# Altium PCB PCB.PcbDoc
Units mm, origin at the board's own origin, x right, y up, seen from the top; angles counter-clockwise.
Board outline 36.25 x 30 mm, 2 copper layers (Top Layer, Bottom Layer); 139 components, 96 nets, 393 pads, 78 vias.
Unrouted connection lines stored in the file: 283.
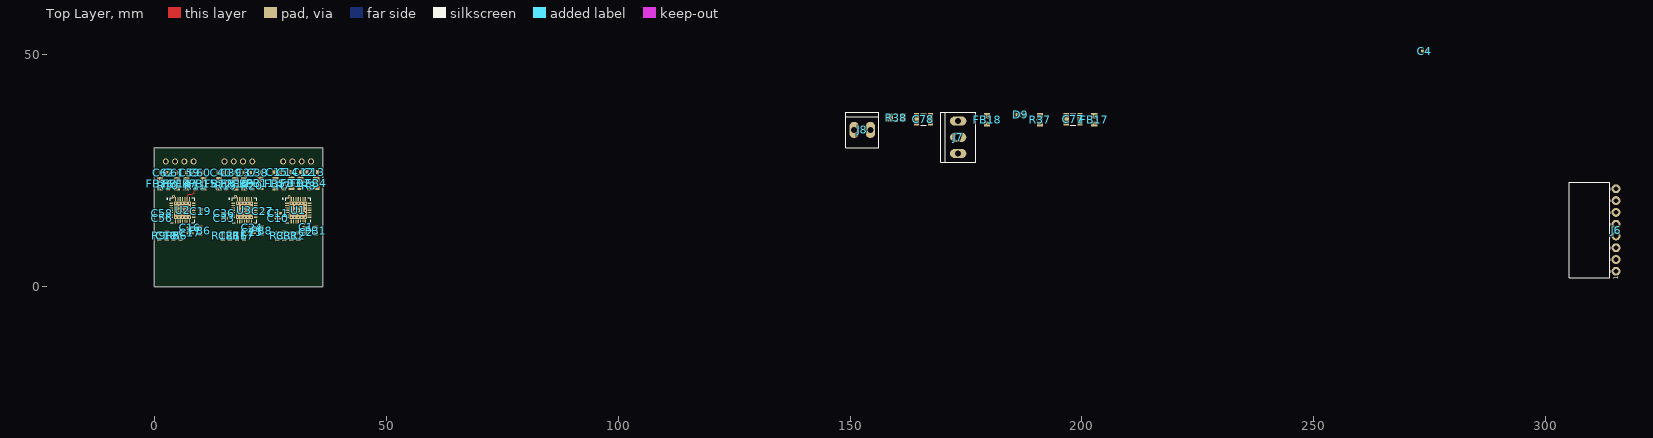
[diagram p0: Top Layer view]
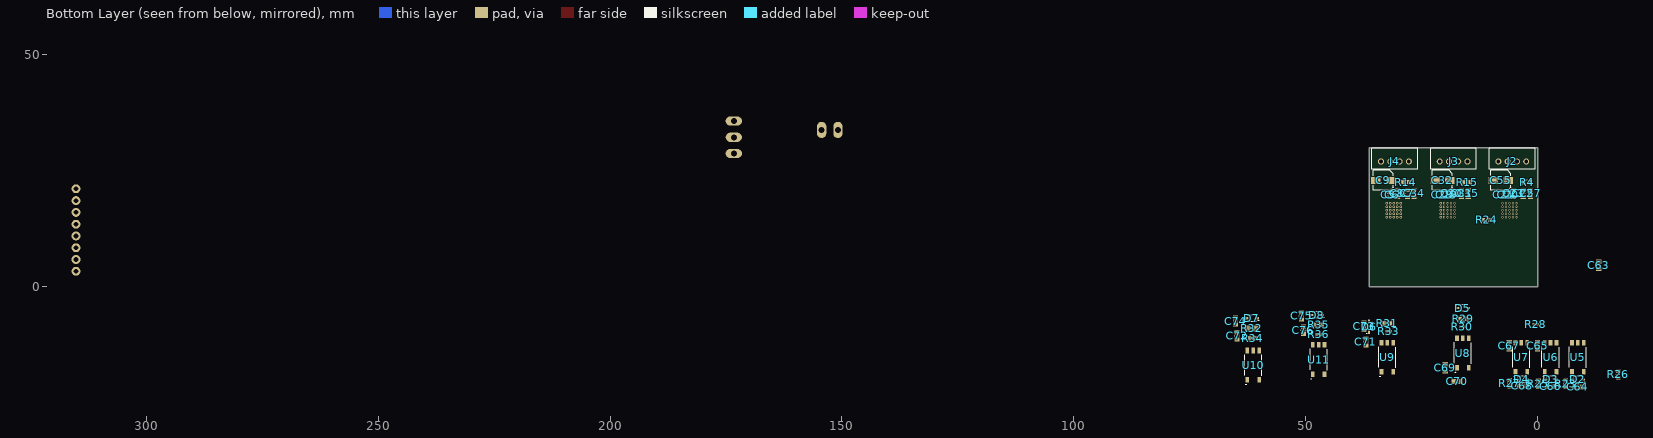
[diagram p1: Bottom Layer view, seen from below]

## Layer stack, top to bottom
Top Solder: solder mask 0.0102, Solder Resist, Dk 3.5
Top Layer: signal copper 0.0356
Dielectric 1: dielectric 0.32, FR-4, Dk 4.8
Bottom Layer: signal copper 0.0356
Bottom Solder: solder mask 0.0102, Solder Resist, Dk 3.5

## Board outline
0,0 0,30 36.25,30 36.25,0

## Design rules (kind name [scope] priority, off if disabled: settings)
Clearance [All] p1: gap=0.15 ignorepadtopadclearanceinfootprint=FALSE
PolygonConnect [All] p1: connectstyle=Relief reliefconductorwidth=0.254 reliefentries=4 polygonreliefangle="90 Angle" airgapwidth=0.254
RoutingVias [All] p1: holewidth=0.2 width=1.27 viastyle="Through Hole" minholewidth=0.2 minwidth=1.27 maxholewidth=0.2 maxwidth=2
SolderMaskExpansion [All] p1: expansion=0.102 istentingtop=FALSE
SupplyNets "Schematic Supply Nets_6" [InNet('SGND')] p1: voltage=0.000
SupplyNets "Schematic Supply Nets_5" [InNet('PGND')] p2: voltage=0.000
SupplyNets "Schematic Supply Nets_4" [InNet('GND')] p3: voltage=0.000
SupplyNets "Schematic Supply Nets_3" [InNet('+VREF_TMC')] p4: voltage=0.000
SupplyNets "Schematic Supply Nets_2" [InNet('+5V')] p5: voltage=0.000
SupplyNets "Schematic Supply Nets_1" [InNet('+5VOUT_TMC')] p6: voltage=0.000
SupplyNets "Schematic Supply Nets" [InNet('+24V')] p7: voltage=0.000
Width [All] p1: maxlimit=0.254 minlimit=0.254 preferedwidth=0.254
30 further rules are at their usual default settings.

## Classes and differential pairs
component class "STEPPER MOTOR DRIVERS": C1 C2 C3 C4 C5 C6 C7 C8 C9 C10 C11 C12 C13 C14 C15 C16 C17 C18 C19 C20 C21 C22 C23 C24 C25 C26 C27 C28 C29 C30 C31 C32 C33 C34 C35 C36 C37 C38 C39 C40 C55 C56 C57 C58 C59 C60 C61 C62 FB1 FB2 FB3 FB4 FB5 FB6 FB7 FB8 FB9 FB10 FB11 FB12 FB14 FB15 FB16 J2 J3 J4 R1 R2 R3 R4 R5 R6 R7 R8 R9 R10 R11 R14 R15 R16 R17 R18 R19 R20 U1 U2 U3
component class Root: C77 C78 D9 FB17 FB18 J7 J8 R37 R38
component class OPTOCUPLERS: C63 C64 C65 C66 C67 C68 C69 C70 C71 C72 C73 C74 C75 C76 D2 D3 D4 D5 D6 D7 D8 J6 R23 R24 R25 R26 R27 R28 R29 R30 R31 R32 R33 R34 R35 R36 U5 U6 U7 U8 U9 U10 U11

## Components (designator, comment, footprint, x,y, rotation, side; value= is the part's Value field where it differs from the comment)
C1 "100nF/16V" CAPC1005X04N 32.7,12.8 r0 top value=100nF
C2 "10nF/16V" CAPC1005X04N 32.7,11.8 r0 top value=10nF
C3 "1uF/16V" CAPC1608X06N 28,11 r90 top value=1uF
C4 "1uF/16V" CAPC1005X04N 273.915,50.831 r0 top value=1uF
C5 "10nF/50V" CAPC1005X04N 32.2,19.877 r90 bottom value=10nF
C6 "100nF/50V" CAPC1005X04N 31.3,19.877 r90 bottom value=100nF
C7 "10uF/50V" CAPC1608X06M 28.05,20.11 r90 bottom value=10uF
C8 "10uF/50V" CAPC1608X06M 30.2,20.11 r90 bottom value=10uF
C9 "100uF/50V" CAPAE4543X55L 33.275,22.925 r0 bottom value=100uF
C10 "100nF/50V" CAPC1005X04N 26.7,14.8 r180 top value=100nF
C11 "22nF/50V" CAPC1005X04N 26.7,15.835 r180 top value=22nF
C12 "470pF/100V" CAPC1608X06L 32.2,24.7 r180 top value=470pF
C13 "470pF/100V" CAPC1608X06L 34.5,24.7 r0 top value=470pF
C14 "470pF/100V" CAPC1608X06L 28.8,24.7 r0 top value=470pF
C15 "470pF/100V" CAPC1608X06L 26.5,24.7 r180 top value=470pF
C16 "100nF/16V" CAPC1005X04N 7.7,12.7 r0 top value=100nF
C17 "10nF/16V" CAPC1005X04N 7.7,11.6 r0 top value=10nF
C18 "1uF/16V" CAPC1608X06N 2.609,11 r90 top value=1uF
C19 "1uF/16V" CAPC1005X04N 10.025,16.231 r270 top value=1uF
C20 "10nF/50V" CAPC1005X04N 6.303,19.877 r90 bottom value=10nF
C21 "100nF/50V" CAPC1005X04N 7.253,19.877 r90 bottom value=100nF
C22 "10uF/50V" CAPC1608X06M 3.072,20.11 r90 bottom value=10uF
C23 "10uF/50V" CAPC1608X06M 5.161,20.11 r90 bottom value=10uF
C24 "100nF/16V" CAPC1005X04N 21.1,12.7 r0 top value=100nF
C25 "10nF/16V" CAPC1005X04N 21.1,11.7 r0 top value=10nF
C26 "1uF/16V" CAPC1608X06N 16.25,11 r90 top value=1uF
C27 "1uF/16V" CAPC1005X04N 23.4,16.3 r270 top value=1uF
C28 "10nF/50V" CAPC1005X04N 20.55,19.877 r90 bottom value=10nF
C29 "100nF/50V" CAPC1005X04N 19.625,19.877 r90 bottom value=100nF
C30 "10uF/50V" CAPC1608X06M 18.475,20.11 r90 bottom value=10uF
C31 "10uF/50V" CAPC1608X06M 16.362,20.11 r90 bottom value=10uF
C32 "100uF/50V" CAPAE4543X55L 20.5,22.925 r0 bottom value=100uF
C33 "100nF/50V" CAPC1005X04N 15.1,14.8 r180 top value=100nF
C34 "47uF/50V" CAPC1608X06M 26.6,20.11 r90 bottom value=47uF
C35 "47uF/50V" CAPC1608X06M 14.937,20.11 r90 bottom value=47uF
C36 "22nF/50V" CAPC1005X04N 15.1,15.835 r180 top value=22nF
C37 "470pF/100V" CAPC1608X06L 20,24.6 r180 top value=470pF
C38 "470pF/100V" CAPC1608X06L 22.3,24.6 r0 top value=470pF
C39 "470pF/100V" CAPC1608X06L 16.7,24.6 r0 top value=470pF
C40 "470pF/100V" CAPC1608X06L 14.4,24.6 r180 top value=470pF
C55 "100uF/50V" CAPAE4543X55L 7.909,22.925 r0 bottom value=100uF
C56 "100nF/50V" CAPC1005X04N 1.709,14.8 r180 top value=100nF
C57 "47uF/50V" CAPC1608X06M 1.482,20.11 r90 bottom value=47uF
C58 "22nF/50V" CAPC1005X04N 1.709,15.835 r180 top value=22nF
C59 "470pF/100V" CAPC1608X06L 7.565,24.6 r180 top value=470pF
C60 "470pF/100V" CAPC1608X06L 9.835,24.6 r0 top value=470pF
C61 "470pF/100V" CAPC1608X06L 4.235,24.6 r0 top value=470pF
C62 "470pF/100V" CAPC1608X06L 2.015,24.6 r180 top value=470pF
C63 "100nF/16V" CAPC1608X06M -13.2,4.6 r270 bottom value=100nF
C64 "10nF/16V" CAPC1608X06M -8.7,-21.6 r0 bottom value=10nF
C65 "100nF/16V" CAPC1608X06M 0,-12.7 r90 bottom value=100nF
C66 "10nF/16V" CAPC1608X06M -2.9,-21.5 r0 bottom value=10nF
C67 "100nF/16V" CAPC1608X06M 6.1,-12.7 r90 bottom value=100nF
C68 "10nF/16V" CAPC1608X06M 3.3,-21.4 r180 bottom value=10nF
C69 "100nF/16V" CAPC1608X06M 19.9,-17.5 r90 bottom value=100nF
C70 "10nF/16V" CAPC1608X06M 17.3,-20.4 r0 bottom value=10nF
C71 "100nF/16V" CAPC1608X06M 37,-11.9 r90 bottom value=100nF
C72 "100nF/16V" CAPC1608X06M 64.8,-10.6 r90 bottom value=100nF
C73 "10nF/16V" CAPC1608X06M 37.4,-8.5 r90 bottom value=10nF
C74 "10nF/16V" CAPC1608X06M 65.1,-7.4 r90 bottom value=10nF
C75 "100nF/16V" CAPC1608X06M 50.9,-6.3 r90 bottom value=100nF
C76 "10nF/16V" CAPC1608X06M 50.5,-9.4 r90 bottom value=10nF
C77 "22uF/30V" CAPC3225X27N 198.096,36.099 r0 top value=22uF
C78 "22uF/30V" CAPC3225X27N 165.838,36.099 r0 top value=22uF
D2 "*" SODFL250X90-2N -8.7,-20 r0 bottom
D3 "*" SODFL250X90-2N -2.9,-20 r180 bottom
D4 "*" SODFL250X90-2N 3.4,-20 r0 bottom
D5 "*" SODFL250X90-2N 16.1,-4.6 r180 bottom
D6 "*" SODFL250X90-2N 36.305,-8.6 r90 bottom
D7 "*" SODFL250X90-2N 61.6,-6.8 r0 bottom
D8 "*" SODFL250X90-2N 47.6,-6.1 r0 bottom
D9 "RED" DIOMELF1608L 186.793,37.115 r0 top
FB1 "200mA" INDC1608X06N 34.8,12.1 r90 top
FB2 "3A" INDC2012X07N 31.5,22.3 r90 top
FB3 "3A" INDC2012X07N 29.55,22.3 r90 top
FB4 "3A" INDC2012X07N 34.9,22.3 r90 top
FB5 "3A" INDC2012X07N 26.1,22.2 r90 top
FB6 "200mA" INDC1608X06N 9.9,12.1 r90 top
FB7 "3A" INDC2012X07N 6.909,22.2 r90 top
FB8 "200mA" INDC1608X06N 23.1,12.1 r90 top
FB9 "3A" INDC2012X07N 19.3,22.2 r90 top
FB10 "3A" INDC2012X07N 17.4,22.2 r90 top
FB11 "3A" INDC2012X07N 22.875,22.3 r90 top
FB12 "3A" INDC2012X07N 13.9,22.2 r90 top
FB14 "3A" INDC2012X07N 4.879,22.2 r90 top
FB15 "3A" INDC2012X07N 10.559,22.2 r90 top
FB16 "3A" INDC2012X07N 1.209,22.2 r90 top
FB17 "3A" INDC2012X07N 202.668,35.972 r90 top
FB18 "3A" INDC2012X07N 179.554,35.972 r90 top
J2 "4 PIN" B4B-PH-K-S 5.441,27.015 r0 bottom
J3 "4 PIN" B4B-PH-K-S 18.096,27.015 r0 bottom
J4 "4 PIN" B4B-PH-K-S 30.75,27.015 r0 bottom
J6 "CON8" GP8_2.54_FM_ANGLE 315.19,12.223 r90 top
J7 "3PIN" ARK3_3.5 173.331,28.733 r90 top
J8 "*" ARK2_3.5 152.63,33.813 r0 top
R1 "10k 1%" RESC1608X06N 29.5,10.948 r90 top value=10k
R2 "10k 1%" RESC1608X06N 31,10.948 r90 top value=10k
R3 "10k 1%" RESC1608X06N 26.5,10.948 r90 top value=10k
R4 "1R 1%" RESC1608X06N 2.254,22.537 r180 bottom value=1R
R5 "10k 1%" RESC1608X06N 4.109,10.948 r90 top value=10k
R6 "10k 1%" RESC1608X06N 5.609,10.948 r90 top value=10k
R7 "xx 1%" RESC1608X06N 27.9,21.791 r90 top value=xx
R8 "xx 1%" RESC1608X06N 33.4,21.791 r90 top value=xx
R9 "10k 1%" RESC1608X06N 1.059,10.948 r90 top value=10k
R10 "xx 1%" RESC1608X06N 2.985,21.791 r90 top value=xx
R11 "xx 1%" RESC1608X06N 8.885,21.791 r90 top value=xx
R14 "1R 1%" RESC1608X06N 28.4,22.525 r180 bottom value=1R
R15 "1R 1%" RESC1608X06N 15.2,22.525 r180 bottom value=1R
R16 "10k 1%" RESC1608X06N 17.8,10.948 r90 top value=10k
R17 "10k 1%" RESC1608X06N 19.3,10.948 r90 top value=10k
R18 "10k 1%" RESC1608X06N 14.7,10.948 r90 top value=10k
R19 "xx 1%" RESC1608X06N 15.5,21.791 r90 top value=xx
R20 "xx 1%" RESC1608X06N 21.1,21.791 r90 top value=xx
R23 "11.3k 1%" RESC1608X06M -6.1,-20.9 r90 bottom value=11.3k
R24 "33R 1%" RESC1608X06N 11,14.4 r0 bottom value=33R
R25 "11.3k 1%" RESC1608X06M -0.2,-20.9 r90 bottom value=11.3k
R26 "33R 1%" RESC1608X06N -17.4,-18.9 r270 bottom value=33R
R27 "11.3k 1%" RESC1608X06M 6,-20.8 r90 bottom value=11.3k
R28 "33R 1%" RESC1005X03N 0.4,-8.1 r0 bottom value=33R
R29 "11.3k 1%" RESC1608X06M 16,-6.9 r0 bottom value=11.3k
R30 "33R 1%" RESC1005X03N 16.2,-8.6 r0 bottom value=33R
R31 "11.3k 1%" RESC1608X06M 32.4,-7.9 r0 bottom value=11.3k
R32 "11.3k 1%" RESC2012X07N 61.6,-9 r0 bottom value=11.3k
R33 "33R 1%" RESC1005X03N 32.1,-9.6 r0 bottom value=33R
R34 "33R 1%" RESC1608X06N 61.4,-11.1 r0 bottom value=33R
R35 "11.3k 1%" RESC1608X06M 47.2,-8.2 r0 bottom value=11.3k
R36 "33R 1%" RESC1005X03N 47.2,-10.3 r0 bottom value=33R
R37 "1k 1%" RESC2012X07N 190.984,35.972 r90 top value=1k
R38 "1k 1%" RESC3216X14N 159.996,36.48 r0 top value=1k
U1 "TMC2209" QFN50P500X500X90_HS-29N 31,16.5 r0 top
U2 "TMC2209" QFN50P500X500X90_HS-29N 6.05,16.5 r0 top
U3 "TMC2209" QFN50P500X500X90_HS-29N 19.4,16.5 r0 top
U5 "TLP2312" SO-6-5 -8.7,-15.2 r180 bottom
U6 "TLP2312" SO-6-5 -2.8,-15.2 r180 bottom
U7 "TLP2312" SO-6-5 3.5,-15.2 r180 bottom
U8 "TLP2312" SO-6-5 16.1,-14.3 r180 bottom
U9 "TLP2312" SO-6-5 32.4,-15.2 r180 bottom
U10 "TLP2312" SO-6-5 61.3,-16.9 r180 bottom
U11 "TLP2312" SO-6-5 47.2,-15.7 r180 bottom

## Footprints (in the part's own frame and the unit in brackets; to place one, negate y for a bottom-side part, rotate by r counter-clockwise, add the part's x,y. Pads: shape width x height; smd on the part's side, far side on the other; paste and mask are expansions set on the pad)
ARK2_3.5 [mm] "Raster 3.5mm"
  rrect100% 2x3.5 hole 1.3 mask+0.1: 1(-1.75,0) 2(1.75,0)
  silkscreen extent -3.6,-3.8 3.6,3.8, body extent -3.75,-3.5 3.75,3.8, height 8.5
ARK3_3.5 [mm] "3.5mm"
  rrect100% 2x3.5 hole 1.3 mask+0.1: 1(0,0) 2(3.5,0) 3(7,0)
  silkscreen extent -1.85,-3.8 8.85,3.8, body extent -2,-3.55 9,3.75, height 8.5
B4B-PH-K-S [mm] "4WAY CONECTOR 2mm"
  round 1.3 hole 0.8: 1(3,0) 2(1,0) 3(-1,0) 4(-3,0)
  silkscreen extent -4.92,-2.83 4.97,1.68, body extent -4.92,-2.82 4.98,1.68, height 6
CAPAE4543X55L [mm] "Aluminum Electrolytic Capacitor, Body 4,30x4,30x5,50mm, IPC High Density"
  rect 2.05x1.45 smd: 1(-1.6,0) 2(1.6,0)
  silkscreen extent -2.15,-2.15 2.15,2.15, body extent -2.75,-2.15 2.75,2.15, height 4.7
CAPC1005X04N [mm] "Chip Capacitor, 2-Leads, Body 0402  1,00x0,50mm, IPC Medium Density"
  rect 0.62x0.62 smd: 1(-0.46,0) 2(0.46,0)
  body extent -0.5,-0.25 0.5,0.25, height 0.49
CAPC1608X06L [mm] "Chip Capacitor, 2-Leads, Body 0603  1,60x0,85mm, IPC High Density"
  rect 0.7x0.9 smd: 1(-0.65,0) 2(0.65,0)
  silkscreen extent -0.08,-0.45 0.08,0.45, body extent -0.8,-0.4 0.8,0.4, height 0.79
CAPC1608X06M [mm] "Chip Capacitor, 2-Leads, Body 0603  1,60x0,85mm, IPC Low Density"
  rect 0.92x1.1 smd: 1(-0.76,0) 2(0.76,0)
  silkscreen extent -0.08,-0.45 0.08,0.45, body extent -0.8,-0.4 0.8,0.4, height 0.79
CAPC1608X06N [mm] "Chip Capacitor, 2-Leads, Body 0603 1,60x0,85mm, IPC Medium Density"
  rect 0.82x1 smd: 1(-0.72,0) 2(0.72,0)
  silkscreen extent -0.08,-0.45 0.08,0.45, body extent -0.8,-0.4 0.8,0.4, height 0.79
CAPC3225X27N [mm] "Chip Capacitor 1210, 2-Leads, Body 3,20x2,50mm, IPC Medium Density"
  rect 1.1x2.65 smd: 1(-1.475,0) 2(1.475,0)
  silkscreen extent -0.55,-1.22 0.55,1.23, body extent -1.6,-1.25 1.6,1.25, height 2.7
DIOMELF1608L [mm] "MELF Diode, 2-Leads, Body 1,60x0,80mm, IPC High Density"
  rect 0.65x0.95 smd: 1(-0.75,0) 2(0.75,0)
  silkscreen extent -0.05,-0.38 0.05,0.38, body extent -0.8,-0.4 0.8,0.4, height 0.6
GP8_2.54_FM_ANGLE [mm]
  round 1.9 hole 1 mask+0.1: 1(-8.89,0) 2(-6.35,0) 3(-3.81,0) 4(-1.27,0)
  round 1.9 hole 1: 5(1.27,0) 6(3.81,0) 7(6.35,0) 8(8.89,0)
  silkscreen extent -10.26,1.2 10.26,10.1, body extent -10.16,-0.2 10.16,10, height 2.5
INDC1608X06N [mm] "Chip Inductor, 2-Leads, Body 1,60x0,85mm, IPC Medium Density"
  rect 0.775x0.95 smd: 1(-0.69,0) 2(0.69,0)
  silkscreen extent -0.08,-0.38 0.08,0.38, body extent -0.8,-0.4 0.8,0.4, height 0.6
INDC2012X07N [mm] "Chip Inductor, 2-Leads, Body 2,00x1,25mm, IPC Medium Density"
  rect 1.15x1.35 smd: 1(-0.875,0) 2(0.875,0)
  silkscreen extent -0.1,-0.6 0.1,0.6, body extent -1.15,-0.67 1.15,0.68, height 0.76
QFN50P500X500X90_HS-29N [mm] "QFN, 28-Leads, Body 5,00x5,00mm, Pitch 0,50mm, Thermal Pad 3,70x3,70mm, IPC Medium Density"
  rect 0.8x0.25 smd: 1(-2.425,1.5) 2(-2.425,1) 3(-2.425,0.5) 4(-2.425,0) 5(-2.425,-0.5) 6(-2.425,-1) 7(-2.425,-1.5) 15(2.425,-1.5) 16(2.425,-1) 17(2.425,-0.5) 18(2.425,0) 19(2.425,0.5) 20(2.425,1) 21(2.425,1.5)
  rect 0.25x0.8 smd: 8(-1.5,-2.425) 9(-1,-2.425) 10(-0.5,-2.425) 11(0,-2.425) 12(0.5,-2.425) 13(1,-2.425) 14(1.5,-2.425) 22(1.5,2.425) 23(1,2.425) 24(0.5,2.425) 25(0,2.425) 26(-0.5,2.425) 27(-1,2.425) 28(-1.5,2.425)
  rect 3.7x3.7 smd: 29(0,0)
  silkscreen extent -3.42,-2.65 2.65,2.65, body extent -2.5,-2.5 2.5,2.5, height 1
RESC1005X03N [mm] "Chip Resistor, 2-Leads, Body 1,00x0,50mm, IPC Medium Density"
  rect 0.65x0.55 smd: 1(-0.4,0) 2(0.4,0)
  body extent -0.5,-0.25 0.5,0.25, height 0.27
RESC1608X06M [mm] "Chip Resistor, 2-Leads, Body 1,60x0,85mm, IPC Low Density"
  rect 0.86x1.05 smd: 1(-0.73,0) 2(0.73,0)
  silkscreen extent -0.1,-0.43 0.1,0.43, body extent -0.8,-0.41 0.8,0.39, height 0.47
RESC1608X06N [mm] "Chip Resistor, 2-Leads, Body 1,60x0,85mm, IPC Medium Density"
  rect 0.775x0.95 smd: 1(-0.69,0) 2(0.69,0)
  silkscreen extent -0.08,-0.38 0.08,0.38, body extent -0.8,-0.41 0.8,0.39, height 0.47
RESC2012X07N [mm] "Chip Resistor, 2-Leads, Body 2,00x1,25mm, IPC Medium Density"
  rect 1.15x1.35 smd: 1(-0.875,0) 2(0.875,0)
  silkscreen extent -0.1,-0.6 0.1,0.6, body extent -1.15,-0.67 1.15,0.68, height 0.76
RESC3216X14N [mm] "1206 Chip Resistor, 2-Leads, Body 3,20x1,60mm, IPC Medium Density"
  rect 1.3x1.8 smd: 1(-1.4,0) 2(1.4,0)
  silkscreen extent -0.35,-0.8 0.35,0.8, body extent -1.6,-0.8 1.6,0.8, height 1
SO-6-5 [mm]
  rect 0.8x1.2 smd: 1(-1.27,-3.15) 3(1.27,-3.15) 4(1.27,3.15) 5(0,3.15) 6(-1.27,3.15)
  silkscreen extent -1.85,-4.2 1.85,2.27, body extent -1.86,-3.46 1.84,3.54, height 2.2
SODFL250X90-2N [mm] "SOD-323, SODFL, 2-Leads, Body 1,25x2,50mm, IPC Medium Density"
  rect 0.8x0.45 smd: 1(-1.15,0) 2(1.15,0)
  silkscreen extent -1.5,-0.7 0.9,0.7, body extent -1.25,-0.63 1.25,0.62, height 0.98

## Part data
C1 C2 C4 C16 C17 C19 C24 C25 C27: library part C, DielectricType=X7R, Package=0402, Tolerant=10%, Voltage=16V
C3 C18 C26 C63 C64 C65 C66 C67 C68 C69 C70 C71 C72 C73 C74 C75 C76: library part C, DielectricType=X7R, Package=0603, Tolerant=10%, Voltage=16V
C5 C6 C10 C11 C20 C21 C28 C29 C33 C36 C56 C58: library part C, DielectricType=X7R, Package=0402, Tolerant=10%, Voltage=50V
C7 C8 C22 C23 C30 C31 C34 C35 C57: library part C, DielectricType=X7R, Package=0603, Tolerant=10%, Voltage=50V
C9 C32 C55: library part C_EL, Package="5.3mm SMT", Tolerant=10%, Voltage=50V
C12 C13 C14 C15 C37 C38 C39 C40 C59 C60 C61 C62: library part C, DielectricType=X7R, Package=0603, Tolerant=10%, Voltage=100V
C77 C78: library part C, DielectricType=X7R, Package=1210, Tolerant=10%, Voltage=30V
D2 D3 D4 D5 D6 D7 D8: library part D_TRANSIL1, Package=Package
D9: library part D_LED, Package=0805
FB1 FB6 FB8: library part FB_1, "Ferrite bead - 2-nd Symbol", Min Frequency=100MHz, Package=0603, Impedance=1k
FB2 FB3 FB4 FB5 FB7 FB9 FB10 FB11 FB12 FB14 FB15 FB16 FB17 FB18: library part FB_1, "Ferrite bead - 2-nd Symbol", Min Frequency=100MHz, Package=0805, Impedance=1k
J2 J3 J4: library part CON_4PIN, Package="JST 2.0mm"
J6: library part CON_8PIN, Package=SMT
J7: library part CON_3PIN, Package=2.54mm, WORKPLAN_Code=EP00
J8: library part CON_2PIN, Package=THT, WORKPLAN_Code=EP00
R1 R2 R3 R4 R5 R6 R7 R8 R9 R10 R11 R14 R15 R16 R17 R18 R19 R20 R23 R25 R27 R29 R31 R32 R35 R37: library part R, Package=0603, Tolerance=1%
R24 R26 R28 R30 R33 R34 R36: library part R, Package=0402, Supplier Part Number 1=CRCW040233R0FKED, Tolerance=1%
R38: library part R, Package=1206, Tolerance=1%
U1 U2 U3: "Universal high voltage driver for two-phase bipolar stepper motor. stealthChop™ for quiet  movement. Integrated MOSFETs for up to 2A motor current per coil. With Step/Dir Interface and UART.", Package=QFN-28
U5 U6 U7 U8 U9 U10 U11: "High Speed Optocouplers High speed photocoupler; 5pin SO6", case=SO-6-5, Manufacturer=Toshiba, HelpURL=https://www.mouser.pl/datasheet/3/105/1/D78E77339B69F00393F891A3B84C497312BF0481D7045F2AF290AB6A5F48831E.pdf

## Via types
v1: diameter 0.5, hole 0.3, Top Layer to Bottom Layer, 75 vias
v2: diameter 0.6, hole 0.3, Top Layer to Bottom Layer, tented both sides, 3 vias

## Nets (pads, with @x,y where several pads share a name; then routed paths per layer and width w, separated by ;. In a path a pad name is that pad's centre, name@x,y a point inside that pad or via, vN(x,y) a via of type N, cw(c..) or ccw(c..) an arc to the next point about the centre after c; other vN are vias at no path point)
+5V: C63.2 C65.2 C67.2 C69.2 C71.2 C72.2 C75.2 C78.2 FB1.1 FB6.1 FB8.1 FB18.2 R1.1 R2.1 R3.1 R5.1 R6.1 R9.1 R16.1 R17.1 R18.1 R38.2 U5.6 U6.6 U7.6 U8.6 U9.6 U10.6 U11.6
+5VOUT_TMC: C3.2 C18.2 C26.2 U1.8 U2.8 U3.8
+24V: C5.2 C6.2 C7.2 C8.2 C9.1 C20.2 C21.2 C22.2 C23.2 C28.2 C29.2 C30.2 C31.2 C32.1 C55.1 C77.2 FB17.2 R4.1 R14.1 R15.1 R37.2 U1.22 U2.22 U3.22
+VREF_TMC: C4.2 C19.2 C27.2 U1.17 U2.17 U3.17
DIR_A: R26.1 U2.19
DIR_B: R30.1 U3.19
DIR_C: R36.1 U1.19
GND: C77.1 C78.1 D9.1 J7.3 J8.2
ISO_DIR_A: J6.2 R25.1
ISO_DIR_B: J6.4 R29.1
ISO_DIR_C: J6.6 R35.1
ISO_MOTOR_EN: J6.7 R32.1
ISO_STEP_A: J6.1 R23.1
ISO_STEP_B: J6.3 R27.1
ISO_STEP_C: J6.5 R31.1
MOTOR_EN: R34.1 U1.2 U2.2 U3.2
NetC1_2: C1.2 C2.2 FB1.2 U1.15
NetC10_1: C10.1 U1.6
NetC10_2: C10.2 U1.28 | length 0.9
  Top Layer w0.254: v2(29.05,19.5) 29.05,19.388 29.215,19.223 29.215,19.21 29.227,19.198 29.498,19.198 29.5,19.196 U1.28
NetC11_1: C11.1 U1.5
NetC11_2: C11.2 U1.4
NetC12_2: C12.2 FB2.2 J4.2
NetC13_2: C13.2 FB4.2 J4.1
NetC14_2: C14.2 FB3.2 J4.3
NetC15_2: C15.2 FB5.2 J4.4
NetC16_2: C16.2 C17.2 FB6.2 U2.15
NetC24_2: C24.2 C25.2 FB8.2 U3.15
NetC33_1: C33.1 U3.6
NetC33_2: C33.2 U3.28 | length 0.9
  Top Layer w0.254: v2(17.45,19.5) 17.45,19.388 17.615,19.223 17.615,19.21 17.627,19.198 17.898,19.198 17.9,19.196 U3.28
NetC34_2: C34.2 R14.2
NetC35_2: C35.2 R15.2
NetC36_1: C36.1 U3.5
NetC36_2: C36.2 U3.4
NetC37_2: C37.2 FB9.2 J3.2
NetC38_2: C38.2 FB11.2 J3.1
NetC39_2: C39.2 FB10.2 J3.3
NetC40_2: C40.2 FB12.2 J3.4
NetC56_1: C56.1 U2.6
NetC56_2: C56.2 U2.28 | length 0.9
  Top Layer w0.254: v2(4.1,19.5) 4.1,19.388 4.265,19.223 4.265,19.21 4.277,19.198 4.548,19.198 4.55,19.196 U2.28
NetC57_2: C57.2 R4.2
NetC58_1: C58.1 U2.5
NetC58_2: C58.2 U2.4
NetC59_2: C59.2 FB7.2 J2.2
NetC60_2: C60.2 FB15.2 J2.1
NetC61_2: C61.2 FB14.2 J2.3
NetC62_2: C62.2 FB16.2 J2.4
NetC64_2: C64.2 D2.2 R23.2 U5.1
NetC66_2: C66.2 D3.2 R25.2 U6.1
NetC68_2: C68.2 D4.2 R27.2 U7.1
NetC70_2: C70.2 D5.2 R29.2 U8.1
NetC73_2: C73.2 D6.2 R31.2 U9.1
NetC74_2: C74.2 D7.2 R32.2 U10.1
NetC76_2: C76.2 D8.2 R35.2 U11.1
NetD9_1: D9.2 R37.1
NetFB2_1: FB2.1 U1.24
NetFB3_1: FB3.1 U1.26
NetFB4_1: FB4.1 U1.21
NetFB5_1: FB5.1 U1.1
NetFB7_1: FB7.1 U2.24
NetFB9_1: FB9.1 U3.24
NetFB10_1: FB10.1 U3.26
NetFB11_1: FB11.1 U3.21
NetFB12_1: FB12.1 U3.1
NetFB14_1: FB14.1 U2.26
NetFB15_1: FB15.1 U2.21
NetFB16_1: FB16.1 U2.1
NetFB17_1: FB17.1 J7.1
NetFB18_1: FB18.1 J7.2
NetJ8_1: J8.1 R38.1
NetR1_2: R1.2 U1.9
NetR2_2: R2.2 U1.10
NetR3_2: R3.2 U1.7
NetR5_2: R5.2 U2.9
NetR6_2: R6.2 U2.10
NetR7_1: R7.1 U1.27
NetR8_1: R8.1 U1.23
NetR9_2: R9.2 U2.7
NetR10_1: R10.1 U2.27
NetR11_1: R11.1 U2.23 | length 3.5
  Top Layer w0.254: U2.23 7.05,19.55 7.4,19.9 8.2,19.9 8.6,20.3 R11.1@8.6,21.3
NetR16_2: R16.2 U3.9
NetR17_2: R17.2 U3.10
NetR18_2: R18.2 U3.7
NetR19_1: R19.1 U3.27
NetR20_1: R20.1 U3.23
NetR24_2: R24.2 U5.5
NetR26_2: R26.2 U6.5
NetR28_2: R28.2 U7.5
NetR30_2: R30.2 U8.5
NetR33_2: R33.2 U9.5
NetR34_2: R34.2 U10.5
NetR36_2: R36.2 U11.5
PGND: C1.1 C2.1 C3.1 C4.1 C5.1 C6.1 C7.1 C8.1 C9.2 C12.1 C13.1 C14.1 C15.1 C16.1 C17.1 C18.1 C19.1 C20.1 C21.1 C22.1 C23.1 C24.1 C25.1 C26.1 C27.1 C28.1 C29.1 C30.1 C31.1 C32.2 C34.1 C35.1 C37.1 C38.1 C39.1 C40.1 C55.2 C57.1 C59.1 C60.1 C61.1 C62.1 C63.1 C65.1 C67.1 C69.1 C71.1 C72.1 C75.1 R7.2 R8.2 R10.2 R11.2 R19.2 R20.2 U1.3 U1.13 U1.18 U1.25 U1.29 U2.3 U2.13 U2.18 U2.25 U2.29 U3.3 U3.13 U3.18 U3.25 U3.29 U5.4 U6.4 U7.4 U8.4 U9.4 U10.4 U11.4
  other v1: 4.55,15 5.3,15 6.05,15 6.8,15 7.55,15 17.9,15 18.65,15 19.4,15 20.15,15 20.9,15 29.5,15 30.25,15 31,15 31.75,15 32.5,15 4.55,15.75 5.3,15.75 6.05,15.75 6.8,15.75 7.55,15.75 17.9,15.75 18.65,15.75 19.4,15.75 20.15,15.75 20.9,15.75 29.5,15.75 30.25,15.75 31,15.75 31.75,15.75 32.5,15.75 4.55,16.5 5.3,16.5 6.05,16.5 6.8,16.5 7.55,16.5 17.9,16.5 18.65,16.5 19.4,16.5 20.15,16.5 20.9,16.5 29.5,16.5 30.25,16.5 31,16.5 31.75,16.5 32.5,16.5 4.55,17.25 5.3,17.25 6.05,17.25 6.8,17.25 7.55,17.25 17.9,17.25 18.65,17.25 19.4,17.25 20.15,17.25 20.9,17.25 29.5,17.25 30.25,17.25 31,17.25 31.75,17.25 32.5,17.25 4.55,18 5.3,18 6.05,18 6.8,18 7.55,18 17.9,18 18.65,18 19.4,18 20.15,18 20.9,18 29.5,18 30.25,18 31,18 31.75,18 32.5,18
SGND: C64.1 C66.1 C68.1 C70.1 C73.1 C74.1 C76.1 D2.1 D3.1 D4.1 D5.1 D6.1 D7.1 D8.1 U5.3 U6.3 U7.3 U8.3 U9.3 U10.3 U11.3
STEP_A: R24.1 U2.16
STEP_B: R28.1 U3.16
STEP_C: R33.1 U1.16
pads on no net: J6.8 U1.11 U1.12 U1.14 U1.20 U2.11 U2.12 U2.14 U2.20 U3.11 U3.12 U3.14 U3.20

## Silkscreen, mask and mechanical layers (free items; w line width, h text height)
Mechanical 1:
  the board outline again, w0.1

## Text inside footprints (layer, text, board x,y; h text height)
J6: Top Overlay "1" at 315.69,1.523 h1 r90